# EAGLE board DDS_rev03JD (EAGLE 6.6.0)
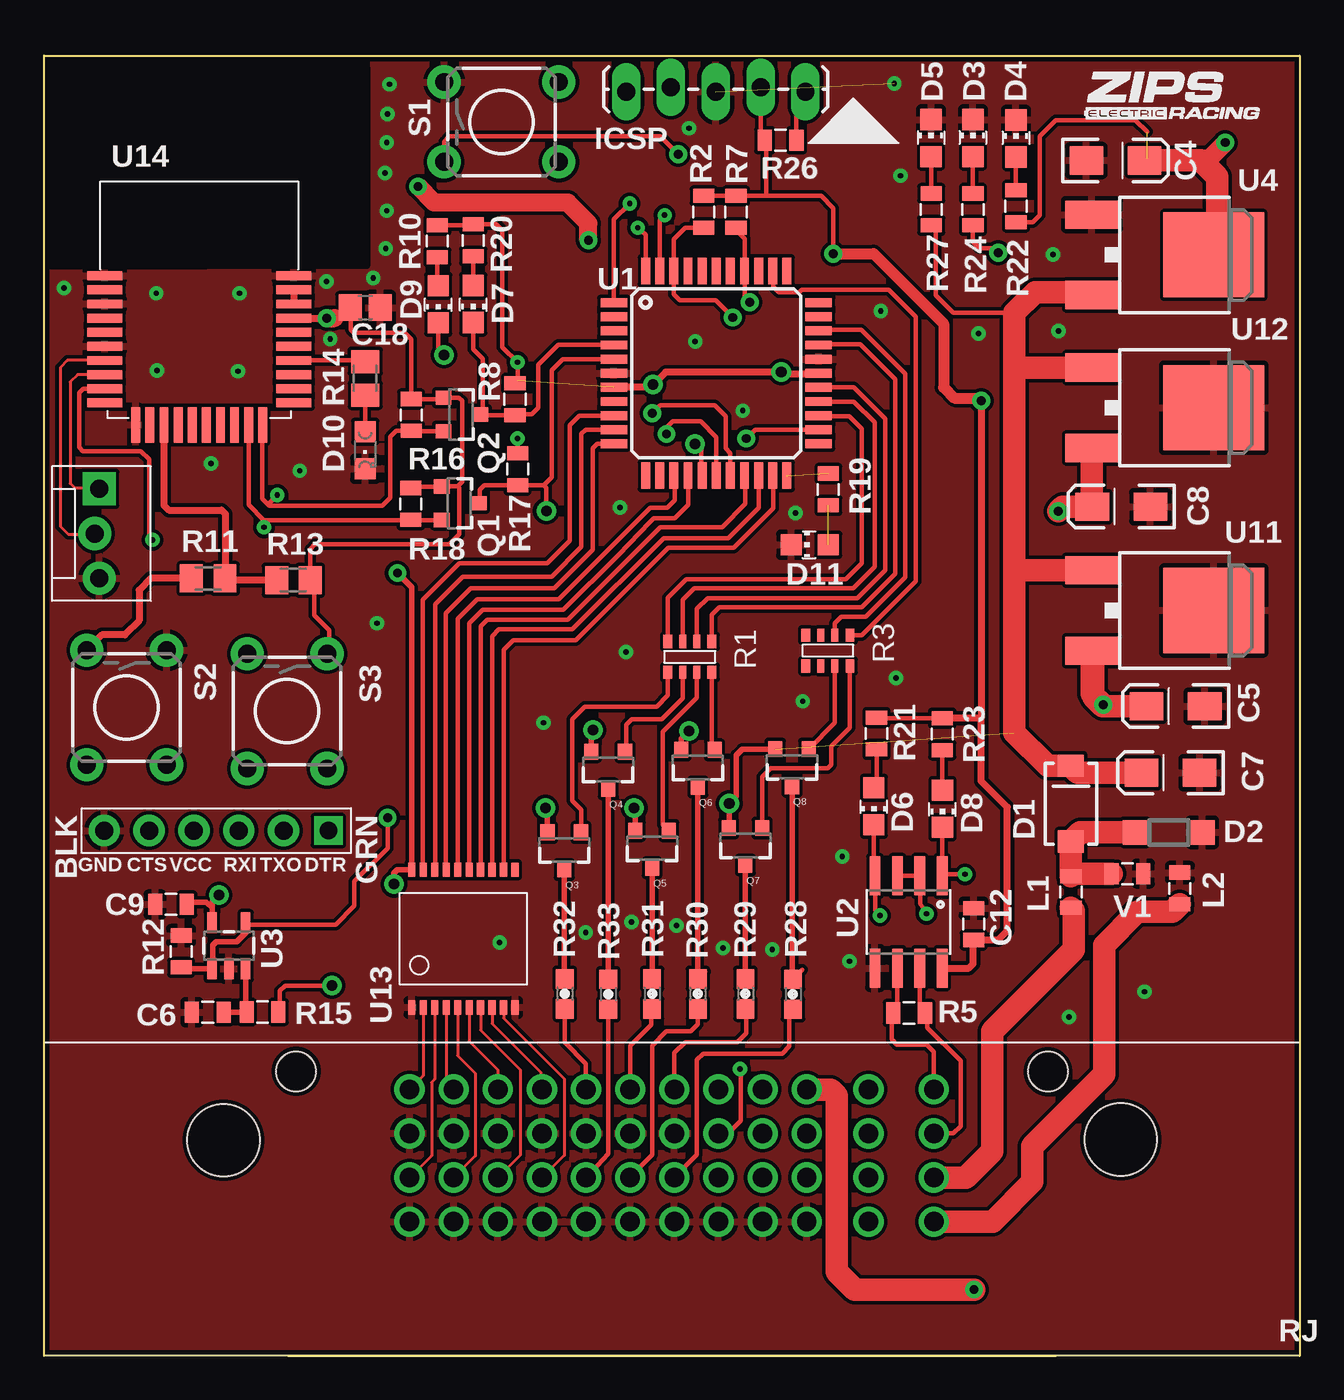
[diagram p0: board, top side]
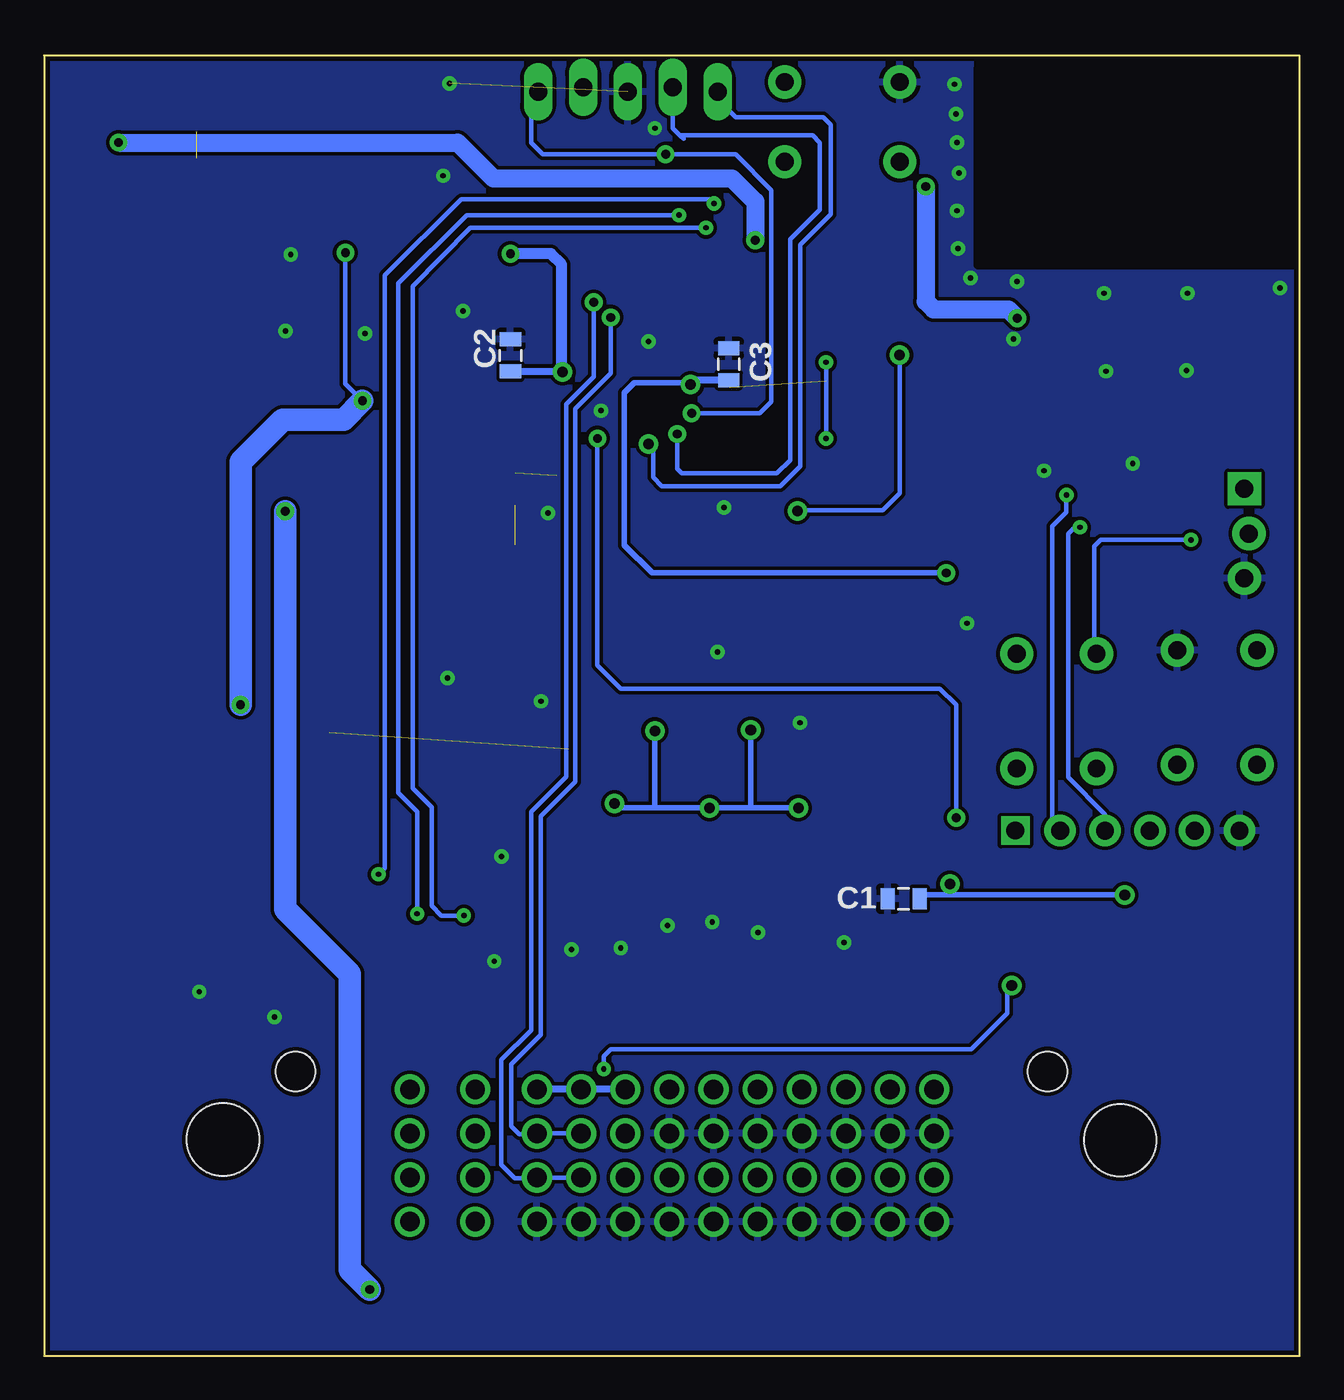
[diagram p1: board, bottom side, seen from below]

Size 71.12 x 73.66 mm. Coordinates in mm from the lower left corner, seen from the top.
Copper layers (1*16): Top 0.035mm / dielectric 1.5mm / Bottom 0.035mm
Design rules "SparkFun *": minimum track width 8mil, minimum drill 18mil, track to track 8mil, track to pad 8mil, pad to pad 8mil, via to via 8mil, smd to smd 8mil, copper to edge 10mil, drill to drill 8mil, minimum pad ring 12mil, minimum via ring 10mil, stop-mask expansion 4mil, vias tented up to drill 25mil, thermal gap 10mil
tRestrict: area 0.2,61.7 to 18.3,73
bRestrict: area 0.2,61.8 to 18.3,73

## Footprints (pad centres in the part's own frame; a part is rotated, then mirrored left to right if it is on the bottom)
0805 = smd 0.8 x 1.2: 1 -0.9,0; 2 0.9,0
EIA3216-16V = smd 1.9 x 1.6: A 1.65,0; C -1.65,0
C0805 = smd 1.3 x 1.5: 1 -0.85,0; 2 0.85,0
SMA = smd 1.27 x 1.47: A -2.15,0; C 2.15,0
SOD-123 = smd 1.4 x 1.4: A 1.9,0; C -1.9,0
CHIP_LED0805 = smd 1.2 x 1.2: A 0,-1.05; C 0,1.05
CHIPLED_0805 = smd 1.2 x 1.2: A 0,-1.05; C 0,1.05
1X05_LOCK_LONGPADS = drill 1.016 long: 1 0,0; 2 2.54,-0.254; 3 5.08,0; 4 7.62,-0.254; 5 10.16,0
36638-M = drill 1.1: 1 20.7,15.1; 2 20.7,12.6; 3 20.7,10.1; 4 20.7,7.6; 5 23.2,15.1; 6 23.2,12.6; 7 23.2,10.1; 8 23.2,7.6; 9 25.7,15.1; 10 25.7,12.6; 11 25.7,10.1; 12 25.7,7.6; 13 28.2,15.1; 14 28.2,12.6; 15 28.2,10.1; 16 28.2,7.6; 17 30.7,15.1; 18 30.7,12.6; 19 30.7,10.1; 20 30.7,7.6; 21 33.2,15.1; 22 33.2,12.6; 23 33.2,10.1; 24 33.2,7.6; 25 35.7,15.1; 26 35.7,12.6; 27 35.7,10.1; 28 35.7,7.6; 29 38.2,15.1; 30 38.2,12.6; 31 38.2,10.1; 32 38.2,7.6; 33 40.7,15.1; 34 40.7,12.6; 35 40.7,10.1; 36 40.7,7.6; 37 43.2,15.1; 38 43.2,12.6; 39 43.2,10.1; 40 43.2,7.6; 41 46.7,15.1; 42 46.7,12.6; 43 46.7,10.1; 44 46.7,7.6; 45 50.4,15.1; 46 50.4,12.6; 47 50.4,10.1; 48 50.4,7.6 | hole 2.25: 56.87,16.1; 14.28,16.12 | hole 4.1: 60.99,12.26; 10.16,12.21
MOLEX-1X3_LOCK = drill 1.016 pad 1.88 square: 1 0,0.127 | drill 1.016 pad 1.88: 2 2.54,-0.127; 3 5.08,0.127
FTDI_DEVICE_SIDE = drill 1 square: P$1 -6.35,0 | drill 1.016 pad 1.778: P$2 -3.81,0; P$3 -1.27,0; P$4 1.27,0; P$5 3.81,0; P$6 6.35,0
SOT23 = smd 0.8 x 0.9: 1 -0.95,-1; 2 0.95,-1; 3 0,1.1
MNR14 = smd 0.5 x 0.75: 1 -1.25,-0.9; 4 1.25,-0.9; 5 1.25,0.85; 8 -1.25,0.85 | smd 0.4 x 0.75: 2 -0.4,-0.9; 3 0.4,-0.9; 6 0.4,0.85; 7 -0.4,0.85
M0805 = smd 1.3 x 1.6: 1 -0.95,0; 2 0.95,0
0603 = smd 1.1 x 1: 1 -0.85,0; 2 0.85,0
TACTILE-PTH = drill 1.016 pad 1.88: 1 -3.251,2.261; 2 3.251,2.261; 3 -3.251,-2.261; 4 3.251,-2.261
TQFP-44 = smd 1.5 x 0.5: 1 -5.8,4; 2 -5.8,3.2; 3 -5.8,2.4; 4 -5.8,1.6; 5 -5.8,0.8; 6 -5.8,0; 7 -5.8,-0.8; 8 -5.8,-1.6; 9 -5.8,-2.4; 10 -5.8,-3.2; 11 -5.8,-4; 23 5.8,-4; 24 5.8,-3.2; 25 5.8,-2.4; 26 5.8,-1.6; 27 5.8,-0.8; 28 5.8,0; 29 5.8,0.8; 30 5.8,1.6; 31 5.8,2.4; 32 5.8,3.2; 33 5.8,4 | smd 0.5 x 1.5: 12 -4,-5.8; 13 -3.2,-5.8; 14 -2.4,-5.8; 15 -1.6,-5.8; 16 -0.8,-5.8; 17 0,-5.8; 18 0.8,-5.8; 19 1.6,-5.8; 20 2.4,-5.8; 21 3.2,-5.8; 22 4,-5.8; 34 4,5.8; 35 3.2,5.8; 36 2.4,5.8; 37 1.6,5.8; 38 0.8,5.8; 39 0,5.8; 40 -0.8,5.8; 41 -1.6,5.8; 42 -2.4,5.8; 43 -3.2,5.8; 44 -4,5.8
SO-8 = smd 0.61 x 2.21: 1 -1.905,-2.616; 2 -0.635,-2.616; 3 0.635,-2.616; 4 1.905,-2.616; 5 1.905,2.616; 6 0.635,2.616; 7 -0.635,2.616; 8 -1.905,2.616
SOT23-5 = smd 0.55 x 1.2: 1 -0.95,-1.3; 2 0,-1.3; 3 0.95,-1.3; 4 0.95,1.3; 5 -0.95,1.3
DPAK = smd 1.6 x 3: 1 -2.28,-4.04; 3 2.28,-4.04 | smd 4.826 x 5.715: 2 0,2.858
SSOP-20 = smd 0.813 x 0.406: 1 -3.9,2.925; 2 -3.9,2.275; 3 -3.9,1.625; 4 -3.9,0.975; 5 -3.9,0.325; 6 -3.9,-0.325; 7 -3.9,-0.975; 8 -3.9,-1.625; 9 -3.9,-2.275; 10 -3.9,-2.925; 11 3.9,-2.925; 12 3.9,-2.275; 13 3.9,-1.625; 14 3.9,-0.975; 15 3.9,-0.325; 16 3.9,0.325; 17 3.9,0.975; 18 3.9,1.625; 19 3.9,2.275; 20 3.9,2.925
A20737AGM = smd 2 x 0.5: 1 -5.35,8.05; 2 -5.35,7.25; 3 -5.35,6.45; 4 -5.35,5.65; 5 -5.35,4.85; 6 -5.35,4.05; 7 -5.35,3.25; 8 -5.35,2.45; 9 -5.35,1.65; 10 -5.35,0.85; 21 5.35,0.85; 22 5.35,1.65; 23 5.35,2.45; 24 5.35,3.25; 25 5.35,4.05; 26 5.35,4.85; 27 5.35,5.65; 28 5.35,6.45; 29 5.35,7.25; 30 5.35,8.05 | smd 0.5 x 2: 11 -3.6,-0.4; 12 -2.8,-0.4; 13 -2,-0.4; 14 -1.2,-0.4; 15 -0.4,-0.4; 16 0.4,-0.4; 17 1.2,-0.4; 18 2,-0.4; 19 2.8,-0.4; 20 3.6,-0.4

## Placement (x,y rotation side)
C1  \0.1UF  [0805]  22.43,25.9 180 bottom
C2  \0.1UF  [0805]  44.7,56.68 90 bottom
C3  \0.1UF  [0805]  32.33,56.17 90 bottom
C4  10UF  [EIA3216-16V]  60.69,67.72 0 top
C5  10UF  [EIA3216-16V]  64.1,36.8 180 top
C6  1UF  [0805]  9.27,19.47 180 top
C7  10UF  [EIA3216-16V]  63.8,33.03 180 top
C8  10UF  [EIA3216-16V]  61.02,48.11 180 top
C9  \0.1UF  [0805]  7.19,25.58 180 top
C12  \0.1UF  [0805]  52.65,24.46 90 top
C18  0.1uF  [C0805]  18.19,59.39 0 top
D1  S1B  [SMA]  58.17,31.28 90 top
D2  11V  [SOD-123]  63.7,29.65 0 top
D3  GREEN  [CHIP_LED0805]  52.62,68.99 0 top
D4  GREEN  [CHIP_LED0805]  55.05,68.96 0 top
D5  GREEN  [CHIP_LED0805]  50.24,68.99 0 top
D6  GREEN  [CHIP_LED0805]  47,31.14 180 top
D7  GREEN  [CHIP_LED0805]  24.31,59.59 180 top
D8  RED  [CHIP_LED0805]  50.89,30.99 180 top
D9  RED  [CHIP_LED0805]  22.33,59.58 180 top
D10  [CHIPLED_0805]  18.19,51.31 180 top
D11  AMBER  [CHIP_LED0805]  43.37,45.95 90 top
ICSP  [1X05_LOCK_LONGPADS]  43.13,71.62 180 top
J1  36638NEW  [36638-M]  0,0 0 top
JP1  [MOLEX-1X3_LOCK]  3,49.12 270 top
JP19  FTDI_DEVICE  [FTDI_DEVICE_SIDE]  9.75,29.76 180 top
L1  L_FB_2A  [0805]  58.17,26.28 90 top
L2  L_FB_2A  [0805]  64.34,26.48 90 top
Q1  BSS123  [SOT23]  23.52,48.3 270 top
Q2  BSS123  [SOT23]  23.62,53.33 270 top
Q3  PNP_MMBT4403LT3G  [SOT23]  29.46,28.65 180 top
Q4  PNP_MMBT4403LT3G  [SOT23]  31.95,33.22 180 top
Q5  PNP_MMBT4403LT3G  [SOT23]  34.44,28.75 180 top
Q6  PNP_MMBT4403LT3G  [SOT23]  37.03,33.32 180 top
Q7  PNP_MMBT4403LT3G  [SOT23]  39.73,28.91 180 top
Q8  PNP_MMBT4403LT3G  [SOT23]  42.37,33.38 180 top
R1  RN-4_2.2K  [MNR14]  36.58,39.57 180 top
R2  2.2K  [0805]  37.36,64.81 90 top
R3  RN-4_2.2K  [MNR14]  44.4,39.93 180 top
R5  120  [0805]  49,19.42 0 top
R7  2.2K  [0805]  39.19,64.81 90 top
R8  10K  [0805]  26.67,54.19 90 top
R10  1K  [0805]  22.28,63.14 90 top
R11  1K  [M0805]  9.3,44.04 0 top
R12  10K  [0805]  7.76,22.91 270 top
R13  10K  [M0805]  14.12,43.94 0 top
R14  1K  [M0805]  18.19,55.37 90 top
R15  10K  [0805]  12.37,19.48 0 top
R16  10K  [0805]  20.79,53.3 90 top
R17  10K  [0805]  26.82,50.23 90 top
R18  10K  [0805]  20.76,48.26 90 top
R19  1K  [0805]  44.42,49.09 90 top
R20  1K  [0805]  24.31,63.2 90 top
R21  1K  [0805]  47.16,35.26 90 top
R22  330  [0805]  55.05,65.13 270 top
R23  1K  [0805]  50.88,35.22 90 top
R24  1K  [0805]  52.62,64.95 270 top
R26  10K  [0805]  41.72,68.86 180 top
R27  1.2K  [0805]  50.25,64.95 270 top
R28  RESPLACEHOLDER  [0603]  42.42,20.49 270 top
R29  RESPLACEHOLDER  [0603]  39.73,20.51 270 top
R30  RESPLACEHOLDER  [0603]  37.03,20.51 270 top
R31  RESPLACEHOLDER  [0603]  34.44,20.51 270 top
R32  RESPLACEHOLDER  [0603]  29.49,20.51 270 top
R33  RESPLACEHOLDER  [0603]  31.95,20.49 270 top
S1  SWITCH-MOMENTARY-2PTH  [TACTILE-PTH]  25.91,69.9 0 top
S2  NO  [TACTILE-PTH]  4.67,36.73 270 top
S3  [TACTILE-PTH]  13.77,36.53 270 top
U1  PIC18F45K22  [TQFP-44]  38.07,55.66 0 top
U2  SN75HVD08DRSOIC  [SO-8]  48.97,24.57 180 top
U3  OPA344  [SOT23-5]  10.46,23.23 0 top
U4  NCP1117DT_3.3  [DPAK]  63.4,62.37 270 top
U11  NCV7805BDTRKG  [DPAK]  63.4,42.23 270 top
U12  NCV7805BDTRKG  [DPAK]  63.4,53.71 270 top
U13  MAX6818  [SSOP-20]  23.75,23.63 90 top
U14  A20737AGM  [A20737AGM]  8.79,53.14 0 top
U$1  INDPK1  [PICKIT-PIN-1]  45.85,71.23 180 top
U$3  LOGO16-2-M  [2016-2-LOGO-M]  58.83,70 0 top
V1  10.8V  [0805]  61.37,27.32 0 top

## Library data of the parts
C1-C3 C9 C12 = FSAE Electric; PARTNO: CC0805ZRY5V9BB104
C4 C5 C7 C8 = FSAE Electric; PARTNO: T491A106M016AT
C6 = FSAE Electric; PARTNO: UMK212F105ZG-T
C18 D10 R11 R13 R14 = adafruit
D1 = FSAE Electric; PARTNO: S1B
D2 = FSAE Electric; PARTNO: NZH11C,115
D3-D7 = FSAE Electric; PARTNO: LTST-S220GKT
D8 D9 = FSAE Electric; PARTNO: LH R974-LP-1
D11 = FSAE Electric; PARTNO: HSMA-C170
ICSP JP1 JP19 = SparkFun-Connectors
J1 R28-R33 U$1 = FSAE Electric
L1 L2 = FSAE Electric; PARTNO: FBMH2012HM121-T
Q1 Q2 = FSAE Electric; PARTNO: BSS123,215
Q3-Q8 = FSAE Electric; PARTNO: MMBT4403LT3G
R1 R3 = FSAE Electric; PARTNO: MNR14ERAPJ222
R2 R7 = FSAE Electric; PARTNO: RC0805FR-072K2L
R5 = FSAE Electric; PARTNO: RC0805FR-07120RL
R8 R12 R15-R18 R26 = FSAE Electric; PARTNO: RC0805FR-0710KL
R10 R19-R21 R23 R24 = FSAE Electric; PARTNO: RC0805FR-071KL
R22 = FSAE Electric; PARTNO: RC0805FR-07330RL
R27 = FSAE Electric; PARTNO: RC0805FR-071K2L
S1-S3 = SparkFun-Electromechanical
U1 = FSAE Electric; PARTNO: PIC18F45K22T-I/PT
U2 = FSAE Electric; PARTNO: SN75176BDR
U3 = FSAE Electric; PARTNO: OPA344NA/3K
U4 = FSAE Electric; PARTNO: NCP1117DT33RKG
U11 U12 = FSAE Electric; PARTNO: NCV7805BDTRKG
U13 = FSAE Electric; PARTNO: MAX6818EAP+
U14 = RJC; PARTNO: A20737AGM
U$3 = Pic
V1 = FSAE Electric; PARTNO: VCAS080509A200DP

## Nets
5V2: C8.A J1.29 J1.33 J1.37 U12.3
+: J1.47 L1.1
+3V3: C4.A C18.1 Q1.1 Q2.1 R13.2 R16.2 R18.2 R22.2 S3.1 U4.2 U14.27
+5V: C1.1 C2.1 C3.1 C5.A C9.1 C12.1 ICSP.2 R2.2 R7.2 R8.2 R10.2 R17.2 R20.2 R21.2 R23.2 R24.2 R26.2 U1.7 U1.28 U2.8 U3.5 U11.3 U13.20
+9V: C7.A D1.C Q3.2 Q4.2 Q5.2 Q6.2 Q7.2 Q8.2 R27.2 U4.3 U11.1 U12.1
-: J1.48 L2.1
_OLED0: J1.17 R32.2
_OLED1: J1.19 R33.2
_OLED2: J1.21 R31.2
_OLED3: J1.23 R30.2
_OLED4: J1.25 R29.2
_OLED5: J1.27 R28.2
ACK: J1.15 U13.9
BLE-INT: U14.23
BLE-RX: JP19.P$2 Q2.2 R16.1 U14.20
BLE-TX: JP19.P$3 Q1.2 R18.1 U14.19
BLE_RESET: R11.2 R13.1 U14.13
GHT: D1.A D2.C L1.2 V1.1
GND: C1.2 C2.2 C3.2 C4.C C5.C C6.2 C7.C C8.C C9.2 C12.2 C18.2 D2.A D3.C D4.C D5.C D10.C D11.C ICSP.3 J1.2 J1.4 J1.6 J1.8 J1.10 J1.12 J1.14 J1.16 J1.18 J1.20 J1.22 J1.24 J1.26 J1.28 J1.32 J1.36 J1.40 JP1.3 JP19.P$6 L2.2 R12.1 S1.1 S2.1 U1.6 U1.29 U2.5 U3.2 U4.1 U11.2 U12.2 U13.1 U13.10 U14.1 U14.3 U14.6 U14.11 U14.30 V1.2
LED0: R3.1 U1.35
LED1: R3.2 U1.31
LED2: R1.1 U1.30
LED3: R1.2 U1.27
LED4: R1.3 U1.26
LED5: R1.4 U1.25
N$1: D11.A R19.1
N$2: R19.2 U1.22
N$3: J1.30 R15.2
N$4: J1.1 U13.2
N$5: Q8.3 R28.1
N$6: R14.2 U14.24
N$7: Q3.1 R1.5
N$8: Q6.1 R1.8
N$9: Q4.1 R1.6
N$10: Q5.1 R1.7
N$11: D6.A R21.1
N$12: Q7.1 R3.8
N$13: Q8.1 R3.7
N$14: D8.A R23.1
N$15: D5.A R27.1
N$17: D9.A R10.1
N$18: D7.A R20.1
N$19: D3.A R24.1
N$20: Q7.3 R29.1
N$25: D4.A R22.1
N$26: C6.1 R15.1 U3.3
N$32: Q6.3 R30.1
N$35: Q5.3 R31.1
N$38: Q3.3 R32.1
N$39: Q4.3 R33.1
N$40: ICSP.4 U1.17
N$43: ICSP.5 U1.16
N$46: ICSP.1 R26.1 S1.3 U1.18
N$47: J1.3 U13.3
N$48: J1.5 U13.4
N$49: J1.7 U13.5
N$50: J1.9 U13.6
N$51: J1.11 U13.7
N$52: U14.28 U14.29
N$54: R11.1 S2.3
N$57: D10.A R14.1
N$58: JP1.1 U14.8
N$60: JP1.2 U14.7
N$61: S3.3 U14.9
POS-SWITCH: U1.38
RS-A: J1.45 R5.1 U2.6
RS-B: J1.46 R5.2 U2.7
RX1: D8.C U1.1 U2.1
RX2: D9.C Q1.3 R17.1 U1.5
S_IN_1: U1.21 U13.12
S_IN_2: U1.20 U13.13
S_IN_3: U1.19 U13.14
S_IN_4: U1.15 U13.15
S_IN_5: U1.14 U13.16
S_IN_6: U1.11 U13.17
S_IN_7: U1.10 U13.18
S_IN_8: U1.9 U13.19
SCL: J1.35 J1.39 R7.1 U1.37
SDA: J1.34 J1.38 R2.1 U1.42
TALK: J1.13 U13.8
TX1: D6.C U1.44 U2.4
TX2: D7.C Q2.3 R8.1 U1.4
U2-RE/DE: U1.43 U2.2 U2.3
VOL: R12.2 U1.24 U3.1 U3.4

## Tracks (layer width: path | path; a pad name or v marks a point on that pad's centre or on a via)
5V2  (via drill 0.5)
  Top 1.27: U12.3 59.36,48.12 C8.A 57.71,48.11 v57.45,47.85 | v52.68,3.76 45.92,3.76 44.91,4.78 44.91,14.73 44.55,15.09 43.21,15.09 J1.37
  Bottom 0.406: J1.29 J1.33 J1.37
  Bottom 1.27: v57.45,47.85 57.45,25.3 53.8,21.64 53.8,4.88 v52.68,3.76
+
  Top 1.27: J1.47 52.21,10.1 53.7,11.58 53.7,18.39 58.32,23.01 58.32,25.22 L1.1
+3V3  (via drill 0.5)  (1 unrouted)
  Top 0.254: R18.2 20.85,49.25 Q1.1 22.55,49.28 23.42,49.28 | 23.42,49.28 23.67,49.53 23.67,54.1 23.5,54.28 Q2.1 22.55,54.2 R16.2 20.79,57.59 20.42,57.96 17.53,57.96 17.37,58.12 17.37,59.35 C18.1 | R13.2 15.07,45.7 15.34,45.97 22.96,45.97 23.52,46.53 23.52,49.17 23.42,49.28 | 15.29,43.72 15.29,41.96 16.15,41.1 16.15,39.9 S3.1 | R22.2 56,64.23 56.39,64.62 56.39,69.09 57.3,70 61.82,70 62.48,69.34 | 62.48,67.86 C4.A
  Top 0.406: U14.27 v16,58.79 | 16.46,58.79 16.74,58.79 C18.1 | 15.29,43.72 R13.2
  Top 1.016: 62.48,67.86 66.03,67.86 v66.9,68.73 | v30.84,63.2 30.84,64.16 29.67,65.33 22.1,65.33 v21.18,66.24 | v16,58.79 16.46,58.79
  Top 1.27: C4.A 65.53,67.72 66.45,66.8 66.45,62.56 U4.2
  Bottom 1.016: v66.9,68.73 47.7,68.73 45.67,66.7 32.16,66.7 30.84,65.38 v30.84,63.2 | v21.18,66.24 21.18,59.74 20.73,59.28 16.5,59.28 v16,58.79
+5V  (via drill 0.3, 0.5, 0.6)  (1 unrouted)
  Top 0.254: R17.2 v26.82,51.97 | R8.2 26.82,55.24 v26.82,56.29 25.96,57.15 25.96,63.75 25.62,64.09 R20.2 24.26,64.04 R10.2 | R23.2 47.19,36.12 R21.2 | R2.2 R7.2 40.95,65.71 | ICSP.2 40.59,69.09 R26.2 40.89,68.78 40.89,65.76 40.95,65.71 | 40.95,65.71 44.02,65.71 44.7,65.02 v44.7,62.43 | R24.2 52.62,63.11 52.98,62.74 53.8,62.74 v54.05,62.48
  Top 0.305: C9.1 8.21,25.7 9.2,25.7 9.52,25.39 U3.5 9.52,25.72 v9.91,26.11 | v19.81,26.72 19.81,27.33 20.02,27.54 U13.20 20.82,43.54 v20.02,44.35
  Top 0.406: U1.7 34.29,54.86 34.44,55.02 v34.49,55.02 35.2,55.73 v41.76,55.73 41.96,55.73 42.06,55.63 43.84,55.63 U1.28 | U1.7 | v53.09,54.1 53.09,36.12 | 53.09,36.12 R23.2 | U2.8 52.39,21.96 52.63,22.2 52.63,23.54 C12.1 54.04,23.56 54.56,24.08 54.56,31.09 53.09,32.56 53.09,36.12
  Top 0.61: v44.7,62.43 46.99,62.43 50.95,58.47 50.95,54.86 51.56,54.25 52.93,54.25 v53.09,54.1
  Top 1.27: C5.A 59.97,36.8 59.44,37.34 59.44,39.87 U11.3 59.36,37.52 v59.99,36.88
  Bottom 0.254: v26.82,51.97 v26.82,56.29 | v54.05,62.48 54.05,55.07 v53.09,54.1
  Bottom 0.305: v9.91,26.11 19.81,26.11 | 19.81,26.11 21.31,26.11 C1.1 | v19.81,26.72 19.81,26.11 | v20.02,44.35 36.68,44.35 38.25,45.92 38.25,54.56 37.69,55.12 34.59,55.12 v34.49,55.02
  Bottom 0.406: C3.1 34.24,55.27 v34.49,55.02 | C2.1 41.81,55.78 v41.76,55.73
  Bottom 0.61: 41.81,55.78 41.81,61.83 42.42,62.43 v44.7,62.43
  Bottom 1.27: v59.99,36.88 59.99,50.65 57.61,53.03 54.15,53.03 v53.09,54.1
+9V  (via drill 0.6)  (1 unrouted)
  Top 0.254: 54.97,59.08 51.51,59.08 50.49,60.1 50.49,63.81 R27.2
  Top 0.305: Q3.2 28.51,30.92 v28.4,31.04 | Q7.2 38.81,29.94 v38.81,31.29 39.22,31.7 39.22,34.04 39.56,34.38 Q8.2 | Q6.2 36.08,34.97 v36.52,35.41 | Q4.2 31,35.37 v31.09,35.46 | Q5.2 33.49,30.97 v33.43,31.04
  Top 1.27: 54.97,44.5 54.97,35.31 56.84,33.43 D1.C 58.56,33.03 C7.A | 54.97,44.5 54.97,55.73 | 54.97,55.73 54.97,59.08 56.13,60.25 59.2,60.25 U4.3 | U12.1 55.23,55.99 54.97,55.73 | U11.1 54.97,44.51 54.97,44.5
  Bottom 0.305: v28.4,31.04 31.04,31.04 | 31.04,31.04 v33.43,31.04 36.52,31.04 | 36.52,31.04 38.56,31.04 v38.81,31.29 | v36.52,35.41 36.52,31.04 | v31.09,35.46 31.09,31.09 31.04,31.04
-
  Top 1.27: J1.48 53.73,7.6 55.98,9.86 55.98,11.89 60.05,15.95 60.05,23.27 61.92,25.15 63.91,25.15 L2.1
_OLED0
  Top 0.254: R32.2 29.49,17.75 30.68,16.56 30.68,15.12 J1.17
_OLED1
  Top 0.254: R33.2 31.95,11.46 J1.19
_OLED2
  Top 0.254: J1.21 33.2,17.55 34.39,18.75 34.39,19.61 R31.2
_OLED3
  Top 0.254: J1.23 33.2,10.14 34.44,11.38 34.44,17.58 35.26,18.39 36.63,18.39 37.03,18.8 R30.2
_OLED4
  Top 0.254: J1.25 35.7,17.16 36.32,17.78 39.27,17.78 39.78,18.29 39.78,19.61 R29.2
_OLED5
  Top 0.254: J1.27 36.98,11.38 36.98,16.76 37.34,17.12 41.81,17.12 42.22,17.53 42.22,19.43 R28.2
ACK
  Top 0.178: U13.9 26.02,19.14 29.46,15.7 29.46,11.36 J1.15
BLE-RX  (via drill 0.3)
  Top 0.254: Q2.2 20.81,52.38 R16.1 19.94,52.4 19.61,52.07 19.61,48.62 19.15,48.16 12.75,48.16 | 12.75,48.16 12.34,48.56 12.34,52.69 U14.20 | 12.75,48.16 12.75,48.31 v13.21,48.77
  Bottom 0.254: v13.21,48.77 13.21,47.8 14.02,46.99 14.02,30.21 JP19.P$2
BLE-TX  (via drill 0.3)
  Top 0.254: Q1.2 21.29,47.35 | 21.29,47.35 20.78,47.35 R18.1 | U14.19 11.59,48.2 12.45,47.35 | 12.45,47.35 21.28,47.35 21.29,47.35 | 12.45,47.35 v12.45,46.94
  Bottom 0.254: v12.45,46.94 12.75,46.94 13.11,46.58 13.11,32.77 11.02,30.68 JP19.P$3
BLE_RESET
  Top 0.406: R13.1 10.35,43.94 R11.2 10.26,44.06 10.26,47.7 10.06,47.9 7.06,47.9 6.79,48.18 U14.13
GHT
  Top 1.27: V1.1 58.31,27.32 L1.2 D1.A 58.69,29.65 D2.C
GND  (via drill 0.3)  (1 unrouted)
  other vias: 14.48,50.14 9.45,50.55 16.21,57.61 1.12,60.5 6.35,60.2 11.07,60.2 10.97,55.78 6.4,55.83 16,60.86 18.64,61.06 19.35,62.74 19.41,64.87 19.3,67.01 19.41,68.73 19.46,70.36 19.56,72.03 30.68,23.98 33.27,24.59 35.81,24.38 38.46,23.11 41.25,23.01 45.62,22.35 36.88,57.45 42.57,47.75 32.97,39.88 32.61,48.06 39.57,53.54 42.98,37.08 48.26,38.4 45.21,28.3 28.3,35.86 18.85,41.5 25.81,23.42 58.06,19.2 62.33,20.62 57.15,62.38 47.4,59.18 36.53,69.55 48.16,72.09 48.51,66.85 57.45,58.06 52.93,57.91
  pour Bottom (rank 4): -3.53,75.17 79.02,75.07 79.02,-3.67 -3.53,-3.57
  pour Top (rank 4): -2.41,77.3 77.44,76.95 77.44,-6.87 -2.41,-6.52
LED0
  Top 0.254: R3.1 46.31,40.83 49.38,43.89 49.38,58.88 47.85,60.4 42.93,60.4 42.77,60.25 41.6,60.25 41.3,60.55 41.3,61.49 U1.35
LED1
  Top 0.254: R3.2 44.8,41.5 45.16,41.86 46.53,41.86 48.77,44.09 48.77,55.63 46.28,58.12 43.93,58.12 U1.31
LED2
  Top 0.254: R1.1 37.83,41.99 38.25,42.42 46.33,42.42 48.21,44.3 48.21,55.32 46.23,57.3 43.91,57.3 U1.30
LED3
  Top 0.254: R1.2 36.98,42.31 37.59,42.93 46.08,42.93 47.65,44.5 47.65,53.09 45.87,54.86 U1.27 | U1.27
LED4
  Top 0.254: R1.3 36.18,42.83 36.83,43.48 45.82,43.48 47.04,44.7 47.04,52.88 45.87,54.05 43.89,54.05 U1.26
LED5
  Top 0.254: R1.4 35.33,42.95 36.37,43.99 45.41,43.99 46.33,44.91 46.33,52.53 45.62,53.24 43.9,53.24 U1.25
N$1  (1 unrouted)
N$2  (1 unrouted)
N$3  (via drill 0.3, 0.6)
  Top 0.254: J1.30 38.76,12.6 39.47,13.31 39.47,16.2 v39.42,16.26 | v16.31,20.98 13.66,20.98 13.36,20.68 13.36,19.57 R15.2
  Bottom 0.254: v39.42,16.26 39.42,16.97 39.01,17.37 18.59,17.37 16.56,19.41 16.56,20.73 v16.31,20.98
N$4
  Top 0.178: U13.2 21.47,15.87 J1.1
N$5
  Top 0.254: 42.95,21.87 R28.1
  Top 0.305: Q8.3 42.37,21.39 R28.1
N$6
  Top 0.254: U14.24 18.12,56.39 R14.2
N$7
  Top 0.254: R1.5 35.33,37.41 34.7,36.78 30.63,36.78 29.92,36.07 29.92,31.45 30.43,30.94 30.43,29.67 Q3.1
N$8
  Top 0.254: R1.8 37.83,34.48 Q6.1
N$9
  Top 0.254: R1.6 36.18,37.24 35,36.07 33.27,36.07 32.97,35.76 32.97,34.29 Q4.1
N$10
  Top 0.254: R1.7 36.98,37.28 35.05,35.36 35.05,30.09 Q5.1
N$11
  Top 0.254: R21.1 47.16,32.34 D6.A
N$12
  Top 0.254: R3.8 45.65,35.59 44.6,34.54 44.6,33.48 44.4,33.27 41.15,33.27 40.69,32.82 40.69,29.92 Q7.1
N$13
  Top 0.254: R3.7 44.8,35.86 Q8.1
N$14
  Top 0.254: R23.1 50.88,32.05 D8.A
N$15
  Top 0.254: R27.1 50.25,67.92 D5.A
N$17
  Top 0.254: R10.1 22.28,60.68 D9.A
N$18
  Top 0.254: R20.1 D7.A
N$19
  Top 0.254: R24.1 D3.A
N$20
  Top 0.305: Q7.3 R29.1
N$25
  Top 0.254: D4.A R22.1
N$26
  Top 0.305: U3.3 11.41,19.54 R15.1 11.46,19.47 C6.1
N$32
  Top 0.254: 37.44,21.77 R30.1
  Top 0.305: Q6.3 R30.1
N$35
  Top 0.254: 34.67,21.59 R31.1
  Top 0.305: Q5.3 R31.1
N$38
  Top 0.305: Q3.3 29.46,21.39 R32.1
N$39
  Top 0.305: Q4.3 R33.1
N$40  (via drill 0.5)
  Top 0.254: U1.17 38.08,52.05 37.19,52.93 35.61,52.93 35.26,52.58 v35.26,52.22
  Bottom 0.254: ICSP.4 35.51,69.55 35.1,69.14 | 34.9,68.94 35.1,69.14 | 35.1,69.14 27.58,69.14 27.18,68.73 27.18,64.92 28.85,63.25 28.85,50.75 29.62,49.99 35,49.99 35.26,50.24 v35.26,52.22
N$43  (via drill 0.6)
  Top 0.254: v36.88,51.66 37.24,51.41 37.24,49.9 U1.16
  Bottom 0.254: ICSP.5 32.97,71.17 31.95,70.16 26.98,70.16 26.57,69.75 26.57,64.67 28.3,62.94 28.3,50.39 29.41,49.28 36.12,49.28 36.63,49.78 36.63,51.51 v36.88,51.66
N$46  (via drill 0.5)
  Top 0.254: S1.3 22.66,68.78 22.96,69.09 34.9,69.09 v35.92,68.07 | R26.1 42.62,71.11 ICSP.1 | U1.18 38.88,51.14 38.61,51.41 38.61,53.24 38,53.85 34.9,53.85 v34.44,53.39
  Bottom 0.254: ICSP.1 43.54,71.21 43.54,68.73 42.88,68.07 v35.92,68.07 31.95,68.07 29.92,66.04 29.92,54.05 30.58,53.39 v34.44,53.39
N$47
  Top 0.178: U13.3 22.12,15.67 21.95,15.49 21.95,11.35 J1.3
N$48
  Top 0.178: U13.4 22.77,15.53 J1.5
N$49
  Top 0.178: U13.5 23.42,17.01 24.43,16 24.43,11.34 J1.7
N$50
  Top 0.178: U13.6 24.07,17.84 25.7,16.2 J1.9
N$51
  Top 0.178: U13.7 24.72,18.46 26.98,16.2 26.98,11.38 J1.11
N$52
  Top 0.406: U14.29 U14.28
N$54
  Top 0.406: R11.1 6.04,44.04 5.38,43.38 5.38,41.66 4.57,40.84 3.28,40.84 S2.3
N$57
  Top 0.254: R14.1 D10.A
N$58
  Top 0.178: U14.8 1.89,55.59 1.47,55.17 1.47,49.43 1.73,49.17 3.07,49.17 JP1.1
N$60
  Top 0.178: U14.7 1.32,56.39 0.91,55.98 0.91,46.99 1.37,46.53 2.82,46.53 JP1.2
N$61  (via drill 0.3)
  Top 0.254: U14.9 2.21,54.79 1.98,54.56 1.98,51.46 2.18,51.26 5.49,51.26 5.94,50.8 5.94,46.43 v6.15,46.23
  Bottom 0.254: v6.15,46.23 11.28,46.23 11.63,45.87 11.63,39.9 S3.3
RS-A
  Top 0.254: U2.6 48.34,19.45 R5.1 48.01,19.33 48.01,17.93 48.31,17.63 49.99,17.63 50.4,17.21 J1.45
RS-B
  Top 0.254: U2.7 49.61,19.3 | 49.61,19.3 R5.2 | 49.61,19.3 49.94,19.3 50.04,19.41 50.04,18.59 51.92,16.71 51.92,13.01 51.51,12.6 J1.46
RX1  (via drill 0.3)
  Top 0.254: D8.C 50.89,26.73 51,26.62 51,27.06 U2.1 50.97,27.28 v52.17,27.28 | U1.1 32.27,64.38 v33.17,65.28
  Bottom 0.254: v33.17,65.28 33.43,65.53 47.5,65.53 51.82,61.21 51.82,27.64 v52.17,27.28
RX2  (via drill 0.6)
  Top 0.254: Q1.3 24.69,48.37 24.69,49.07 24.95,49.33 R17.1 28.3,49.33 | U1.5 29.39,56.46 28.75,55.83 28.75,49.78 28.3,49.33 | D9.C 22.33,57.02 v22.66,56.69 | v28.45,47.85 28.45,49.17 28.3,49.33
  Bottom 0.254: v22.66,56.69 22.66,48.87 23.62,47.9 28.4,47.9 v28.45,47.85
S_IN_1
  Top 0.254: U13.12 26.02,39.99 26.57,40.54 30.12,40.54 35.36,45.77 39.06,45.77 41.3,48.01 41.3,49.84 U1.21
S_IN_2
  Top 0.254: U13.13 25.37,40.77 25.76,41.15 29.92,41.15 35.1,46.33 38.76,46.33 40.49,48.06 40.49,49.85 U1.20
S_IN_3
  Top 0.254: U13.14 24.72,41.34 25.09,41.71 29.67,41.71 34.9,46.94 38.41,46.94 39.73,48.26 39.73,49.81 U1.19
S_IN_4
  Top 0.254: U13.15 24.07,41.5 24.84,42.27 29.41,42.27 32.51,45.36 34.34,47.24 34.54,47.45 35.71,47.45 36.47,48.21 U1.15
S_IN_5
  Top 0.254: U13.16 23.42,41.76 24.54,42.88 29.16,42.88 34.34,48.06 35.31,48.06 35.71,48.46 35.71,49.83 U1.14
S_IN_6
  Top 0.254: U1.11 31.34,51.66 31.09,51.41 31.09,45.67 28.91,43.48 24.18,43.48 22.76,42.06 22.76,27.55 U13.17
S_IN_7
  Top 0.254: U1.10 30.67,52.46 30.43,52.22 30.43,45.82 28.75,44.15 23.72,44.15 22.15,42.57 22.15,27.56 U13.18
S_IN_8
  Top 0.254: U1.9 30.3,53.26 29.77,52.73 29.77,46.18 28.5,44.91 23.52,44.91 21.44,42.82 21.44,27.57 U13.19
SCL  (via drill 0.5)
  Top 0.254: R7.1 39.19,63.78 39.67,63.3 U1.37 | U1.37 | U1.37 39.67,59.99 v39.98,59.69
  Bottom 0.254: v39.98,59.69 39.98,55.47 41.55,53.9 41.55,32.82 43.54,30.84 43.54,18.44 45.21,16.76 45.21,10.82 44.45,10.06 43.24,10.06 J1.39 J1.35
SDA  (via drill 0.5)
  Top 0.254: 35.67,61.38 U1.42 35.66,61.48 35.66,63.25 36.32,63.91 R2.1 | 35.67,61.38 35.66,60.81 | 35.67,61.38 35.67,60.13 36.02,59.79 38.05,59.79 v39.01,58.83
  Bottom 0.254: v39.01,58.83 39.01,55.68 41.05,53.65 41.05,32.51 42.98,30.58 42.98,18.19 44.65,16.51 44.65,13.01 44.2,12.55 43.25,12.55 J1.38 J1.34
TALK
  Top 0.178: U13.8 25.37,18.82 28.14,16.05 28.14,15.16 J1.13
TX1  (via drill 0.3)
  Top 0.254: D6.C 47,27.25 U2.4 47.09,27.16 47.09,25.25 47.35,24.99 v47.35,24.94 | U1.44 34.08,63.51 v33.63,63.91
  Bottom 0.254: v33.63,63.91 46.99,63.91 50.24,60.6 50.24,32.16 49.17,31.09 49.17,25.5 48.62,24.94 v47.35,24.94
TX2
  Top 0.254: U1.4 29.12,57.26 27.99,56.13 27.99,53.7 27.64,53.34 26.72,53.34 R8.1 24.76,53.29 Q2.3 24.84,53.45 24.84,56.49 24.31,57.02 D7.C
U2-RE/DE  (via drill 0.3)
  Top 0.254: U2.3 U2.2 49.63,27.16 49.63,25.6 49.94,25.15 v49.99,25.04 | U1.43 34.88,64.34 v35.15,64.62
  Bottom 0.254: v35.15,64.62 47.19,64.62 51.05,60.76 51.05,31.9 49.99,30.84 v49.99,25.04
VOL  (via drill 0.5)
  Top 0.254: U1.24 40.27,52.46 v39.78,51.97 | v19.46,30.48 19.46,28.75 17.58,26.87 17.58,25.5 16.51,24.43 11.51,24.43 U3.4
  Top 0.305: R12.2 7.84,21.93 U3.1 9.55,21.96 9.55,23.27 9.75,23.47 10.92,23.47 11.41,23.96 U3.4
  Bottom 0.254: v39.78,51.97 39.78,39.12 38.46,37.8 20.37,37.8 19.46,36.88 v19.46,30.48

## Text on the board
tNames: RJ